# EAGLE board MCPGrundplatte8Eingabe_8Ausgabe (EAGLE 9.6.2)
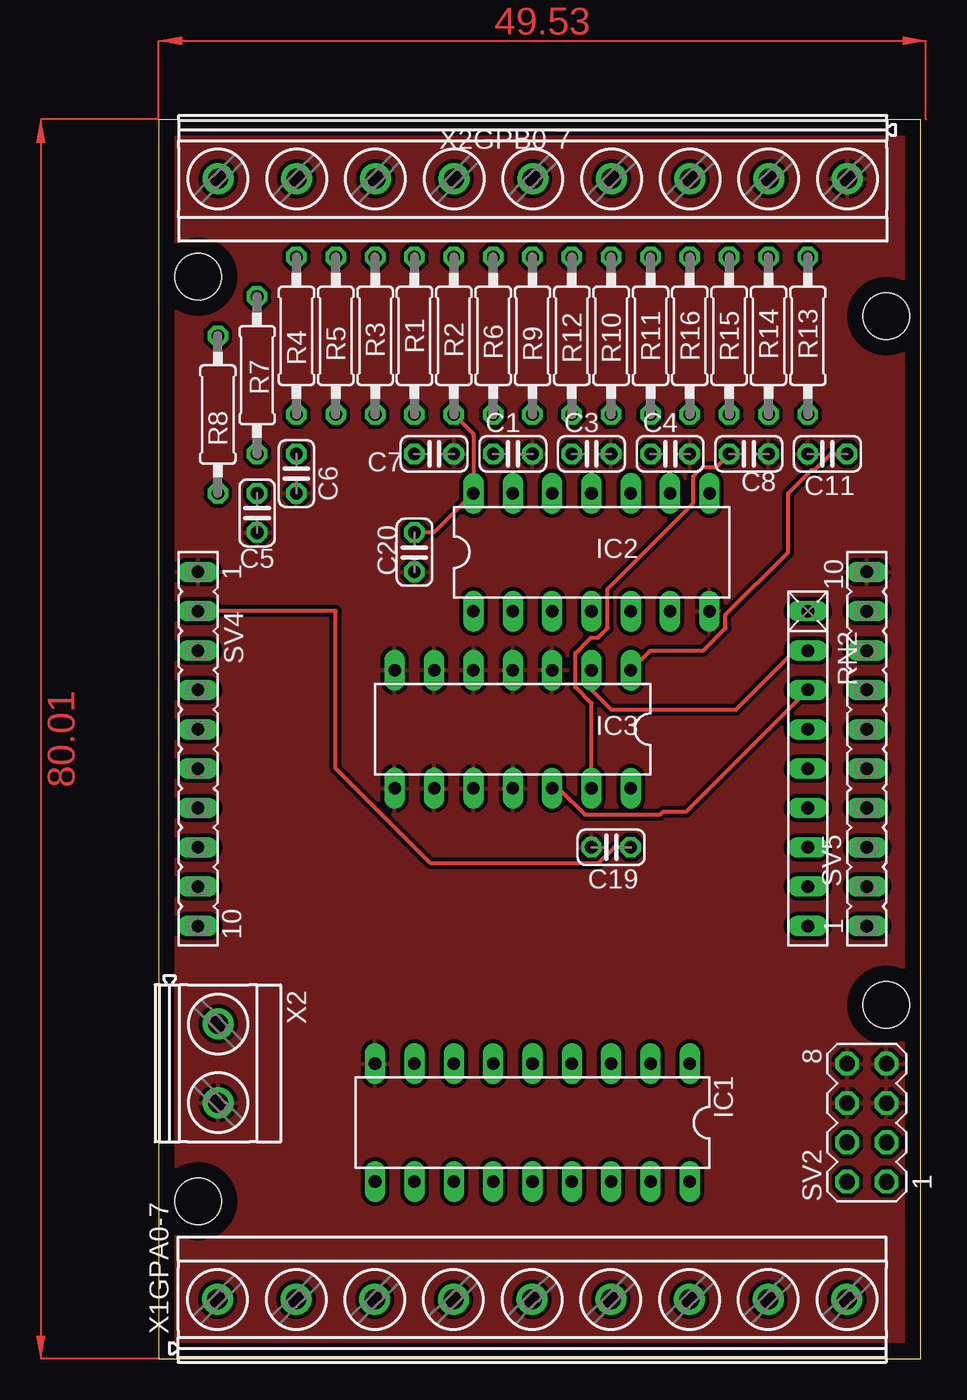
[diagram p0: board, top side]
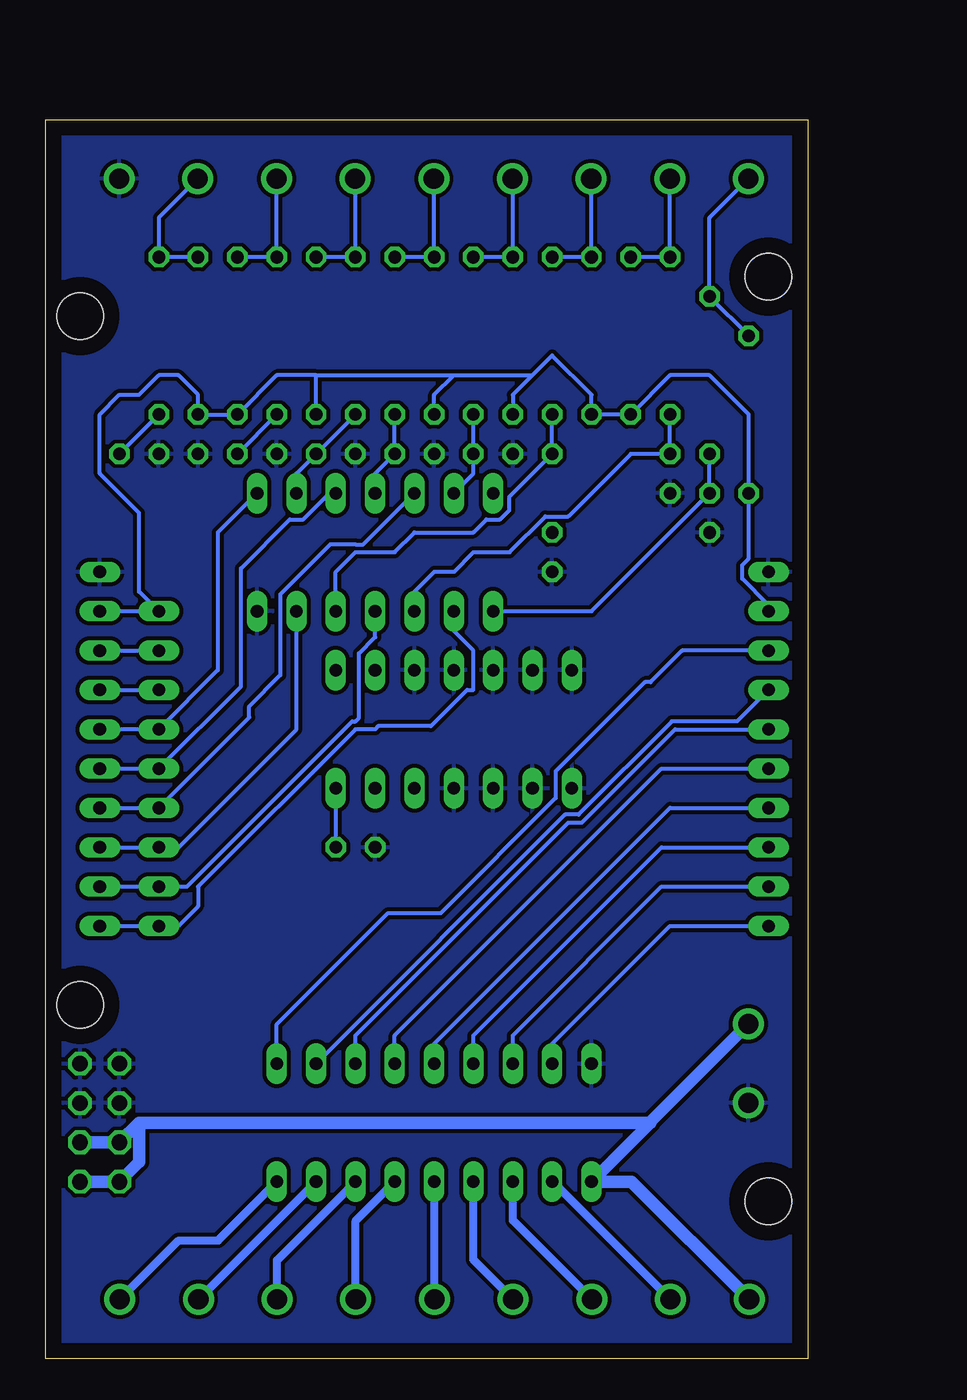
[diagram p1: board, bottom side, seen from below]

Size 49.2 x 80 mm. Coordinates in mm from the lower left corner, seen from the top.
Outline: 0,0 49.2,0 49.2,80 0,80 0,0
Copper layers (1*16): Top 0.035mm / dielectric 1.5mm / Bottom 0.035mm
Design rules "platinenbelichter": minimum track width 10mil, minimum drill 24mil, track to track 10mil, track to pad 10mil, pad to pad 10mil, via to via 10mil, smd to smd 10mil, copper to edge 40mil, drill to drill 8mil, minimum pad ring 10mil, minimum via ring 8mil, stop-mask expansion 10mil, vias tented up to drill 0mil, thermal gap 10mil
Holes 3 mm at 2.54,69.85 46.99,22.86 2.54,10.16 46.99,67.31

## Footprints (pad centres in the part's own frame; a part is rotated, then mirrored left to right if it is on the bottom)
C025-024X044 = drill 0.813 octagon: 1 -1.27,0; 2 1.27,0
DIL18 = drill 0.813 long: 1 -10.16,-3.81; 2 -7.62,-3.81; 3 -5.08,-3.81; 4 -2.54,-3.81; 5 0,-3.81; 6 2.54,-3.81; 7 5.08,-3.81; 8 7.62,-3.81; 9 10.16,-3.81; 10 10.16,3.81; 11 7.62,3.81; 12 5.08,3.81; 13 2.54,3.81; 14 0,3.81; 15 -2.54,3.81; 16 -5.08,3.81; 17 -7.62,3.81; 18 -10.16,3.81
DIL14 = drill 0.813 long: 1 -7.62,-3.81; 2 -5.08,-3.81; 3 -2.54,-3.81; 4 0,-3.81; 5 2.54,-3.81; 6 5.08,-3.81; 7 7.62,-3.81; 8 7.62,3.81; 9 5.08,3.81; 10 2.54,3.81; 11 0,3.81; 12 -2.54,3.81; 13 -5.08,3.81; 14 -7.62,3.81
0207/10 = drill 0.813 octagon: 1 -5.08,0; 2 5.08,0
RN-9 = drill 0.813 long: 1 -10.16,0; 2 -7.62,0; 3 -5.08,0; 4 -2.54,0; 5 0,0; 6 2.54,0; 7 5.08,0; 8 7.62,0; 9 10.16,0
MA04-2 = drill 1.016 octagon: 1 -3.81,-1.27; 2 -3.81,1.27; 3 -1.27,-1.27; 4 -1.27,1.27; 5 1.27,-1.27; 6 1.27,1.27; 7 3.81,-1.27; 8 3.81,1.27
FE10 = drill 0.813 long: 1 -11.43,0; 2 -8.89,0; 3 -6.35,0; 4 -3.81,0; 5 -1.27,0; 6 1.27,0; 7 3.81,0; 8 6.35,0; 9 8.89,0; 10 11.43,0
MKDSN1,5/9-5,08 = drill 1.3 pad 2: 1 -20.341,0.025; 2 -15.261,0.025; 3 -10.181,0.025; 4 -5.101,0.025; 5 -0.021,0.025; 6 5.059,0.025; 7 10.139,0.025; 8 15.219,0.025; 9 20.299,0.025
MKDSN1,5/2-5,08 = drill 1.3 pad 2: 1 -2.561,0.025; 2 2.519,0.025

## Placement (x,y rotation side)
C1  100Nf  [C025-024X044]  22.86,58.42 0 top
C3  100nF  [C025-024X044]  27.94,58.42 0 top
C4  100nF  [C025-024X044]  33.02,58.42 0 top
C5  100nF  [C025-024X044]  6.35,54.61 270 top
C6  100nF  [C025-024X044]  8.89,57.15 270 top
C7  100nF  [C025-024X044]  17.78,58.42 0 top
C8  100nF  [C025-024X044]  38.1,58.42 0 top
C11  100nF  [C025-024X044]  43.18,58.42 180 top
C19  100nF  [C025-024X044]  29.21,33.02 0 top
C20  100nF  [C025-024X044]  16.51,52.07 270 top
IC1  ULN2803  [DIL18]  24.13,15.24 180 top
IC2  74HC14N  [DIL14]  27.94,52.07 0 top
IC3  74HC14N  [DIL14]  22.86,40.64 180 top
R1  10k  [0207/10]  16.51,66.04 270 top
R2  10k  [0207/10]  19.05,66.04 90 top
R3  10k  [0207/10]  13.97,66.04 90 top
R4  10k  [0207/10]  8.89,66.04 270 top
R5  10k  [0207/10]  11.43,66.04 270 top
R6  10k  [0207/10]  21.59,66.04 270 top
R7  10k  [0207/10]  6.35,63.5 270 top
R8  10k  [0207/10]  3.81,60.96 90 top
R9  10k  [0207/10]  24.13,66.04 90 top
R10  10k  [0207/10]  29.21,66.04 270 top
R11  10k  [0207/10]  31.75,66.04 90 top
R12  10k  [0207/10]  26.67,66.04 270 top
R13  10k  [0207/10]  41.91,66.04 270 top
R14  10k  [0207/10]  39.37,66.04 90 top
R15  10k  [0207/10]  36.83,66.04 90 top
R16  10k  [0207/10]  34.29,66.04 270 top
RN2  100K  [RN-9]  41.91,38.1 270 top
SV2  [MA04-2]  45.72,15.24 90 top
SV4  [FE10]  2.54,39.37 270 top
SV5  [FE10]  45.72,39.37 90 top
X1GPA0-7  MKDSN1,5/9-5,08  [MKDSN1,5/9-5,08]  24.13,3.81 0 top
X2  MKDSN1,5/2-5,08  [MKDSN1,5/2-5,08]  3.81,19.05 270 top
X2GPB0-7  MKDSN1,5/9-5,08  [MKDSN1,5/9-5,08]  24.13,76.2 180 top

## Library data of the parts
C1 C3-C8 C11 C19 C20 = rcl; SPICEPREFIX: C
IC1 = uln-udn
IC2 IC3 = 74xx-eu
R1-R16 = rcl; SPICEPREFIX: R
RN2 = resistor-net; OC_FARNELL: unknown; OC_NEWARK: unknown
SV2 = con-lstb; OC_FARNELL: unknown; OC_NEWARK: unknown
SV4 SV5 = con-lsta; OC_FARNELL: unknown; OC_NEWARK: unknown
X1GPA0-7 X2 X2GPB0-7 = con-phoenix-508

## Nets
+12V: IC1.10 SV2.1 SV2.2 SV2.3 SV2.4 X1GPA0-7.1 X2.1
GND: C1.2 C3.2 C4.2 C5.2 C6.2 C7.2 C8.2 C11.2 C19.1 C20.2 IC1.9 IC2.7 IC3.3 IC3.4 IC3.5 IC3.6 IC3.7 IC3.8 IC3.9 IC3.10 IC3.11 SV2.5 SV2.6 SV2.7 SV2.8 SV4.1 SV5.10 X2.2 X2GPB0-7.1
GPA0.: IC1.1 SV4.3
GPA1.: IC1.2 SV4.4
GPA2: IC1.3 SV4.5
GPA3: IC1.4 SV4.6
GPA4: IC1.5 SV4.7
GPA5.: IC1.6 SV4.8
GPA6.: IC1.7 SV4.9
GPA7.: IC1.8 SV4.10
GPB0: R7.1 R8.2 X2GPB0-7.9
GPB0.: IC2.2 RN2.9 SV5.1
GPB1: R4.1 R5.1 X2GPB0-7.8
GPB1.: IC2.4 RN2.8 SV5.2
GPB2: R1.1 R3.2 X2GPB0-7.7
GPB2.: IC2.6 RN2.7 SV5.3
GPB3: R2.2 R6.1 X2GPB0-7.6
GPB3.: IC2.12 RN2.6 SV5.4
GPB4: R9.2 R12.1 X2GPB0-7.5
GPB4.: IC2.10 RN2.5 SV5.5
GPB5: R10.1 R11.2 X2GPB0-7.4
GPB5.: IC2.8 RN2.4 SV5.6
GPB6: R15.2 R16.1 X2GPB0-7.3
GPB6.: IC3.12 RN2.3 SV5.7
GPB7: R13.1 R14.2 X2GPB0-7.2
GPB7.: IC3.2 RN2.2 SV5.8
IC2_OUT1: IC1.18 X1GPA0-7.9
IC2_OUT2: IC1.17 X1GPA0-7.8
IC2_OUT3: IC1.16 X1GPA0-7.7
IC2_OUT4: IC1.15 X1GPA0-7.6
IC2_OUT5: IC1.14 X1GPA0-7.5
IC2_OUT6: IC1.13 X1GPA0-7.4
IC2_OUT7: IC1.12 X1GPA0-7.3
IC2_OUT8: IC1.11 X1GPA0-7.2
N$2: C7.1 IC2.5 R1.2
N$4: C1.1 IC2.13 R6.2
N$5: C6.1 IC2.3 R4.2
N$6: C5.1 IC2.1 R7.2
N$7: C4.1 IC2.9 R10.2
N$8: C3.1 IC2.11 R12.2
N$9: C8.1 IC3.13 R16.2
N$11: C11.1 IC3.1 R13.2
VDD: C19.2 C20.1 IC2.14 IC3.14 R2.1 R3.1 R5.2 R8.1 R9.1 R11.1 R14.1 R15.1 RN2.1 SV4.2 SV5.9

## Tracks (layer width: path | path; a pad name or v marks a point on that pad's centre or on a via)
+12V
  Bottom 0.813: 10.16,15.24 IC1.10 11.38,11.43 X1GPA0-7.1 | X2.1 10.16,15.29 10.16,15.24 | 10.16,15.24 38.1,15.24 43.18,15.24 | 43.18,15.24 SV2.4 SV2.3 | SV2.1 SV2.2 43.18,12.7 43.18,15.24
GND
  pour Bottom: 0,80.01 49.53,80.01 49.53,0 0,0
  pour Top: 0,80.01 49.53,80.01 49.53,0 0,0
GPA0.
  Bottom 0.254: IC1.1 34.29,21.59 27.1,28.78 23.7,28.78 16.28,36.2 16.28,37.92 10.52,43.69 10.16,43.69 8.13,45.72 SV4.3
GPA1.
  Bottom 0.254: IC1.2 15.67,35.13 14.81,35.13 8.79,41.15 4.57,41.15 SV4.4
GPA2
  Bottom 0.254: IC1.3 29.21,20.87 15.46,34.62 14.6,34.62 8.58,40.64 SV4.5
GPA3
  Bottom 0.254: IC1.4 26.67,20.87 9.44,38.1 SV4.6
GPA4
  Bottom 0.254: IC1.5 24.13,20.32 8.89,35.56 SV4.7
GPA5.
  Bottom 0.254: IC1.6 21.59,20.87 9.44,33.02 SV4.8
GPA6.
  Bottom 0.254: IC1.7 19.05,20.87 9.44,30.48 SV4.9
GPA7.
  Bottom 0.254: IC1.8 16.51,20.32 8.89,27.94 SV4.10
GPB0
  Bottom 0.254: X2GPB0-7.9 6.35,73.66 R7.1 R8.2
GPB0.
  Bottom 0.254: SV5.1 RN2.9 40.64,27.94 39.37,29.21 39.37,30.48 29.21,40.64 27.94,40.64 27.74,40.84 24.33,40.84 22,43.18 21.59,43.18 21.59,45.72 22.86,46.99 IC2.2
GPB1
  Bottom 0.254: X2GPB0-7.8 8.89,76.15 R4.1 R5.1
GPB1.
  Bottom 0.254: SV5.2 RN2.8 40.09,30.48 29.42,41.15 29.21,41.15 28.98,41.38 28.98,45.54 27.94,46.58 IC2.4
GPB2
  Bottom 0.254: X2GPB0-7.7 13.97,76.15 R3.2 R1.1
GPB2.
  Bottom 0.254: SV5.3 RN2.7 40.64,33.02 33.02,40.64 IC2.6
GPB3
  Bottom 0.254: X2GPB0-7.6 19.05,76.15 R2.2 R6.1
GPB3.
  Bottom 0.254: SV5.4 RN2.6 36.07,41.4 36.07,42.12 34.06,44.13 34.06,49.35 30.84,52.58 29.21,52.58 28.7,52.58 IC2.12
GPB4
  Bottom 0.254: X2GPB0-7.5 24.13,76.15 R9.2 R12.1
GPB4.
  Bottom 0.254: SV5.5 RN2.5 36.6,43.41 36.6,51.03 33.45,54.18 32.59,54.18 30.89,55.88 IC2.10
GPB5
  Bottom 0.254: R11.2 R10.1 29.21,76.15 X2GPB0-7.4
GPB5.
  Bottom 0.254: IC2.8 38.1,53.34 38.1,44.45 RN2.4 SV5.6
GPB6
  Bottom 0.254: R15.2 R16.1 34.29,76.15 X2GPB0-7.3
GPB6.
  Top 0.254: IC3.12 25.81,36.83 27.51,35.13 32.38,35.13 32.59,35.33 34.06,35.33 RN2.3
  Bottom 0.254: SV5.7 RN2.3
GPB7
  Bottom 0.254: R14.2 R13.1 41.91,73.66 X2GPB0-7.2
GPB7.
  Top 0.254: RN2.2 41.07,45.72 37.26,41.91 29.21,41.91 27.94,43.18 IC3.2
  Bottom 0.254: SV5.8 RN2.2
IC2_OUT1
  Bottom 0.508: X1GPA0-7.9 40.62,7.64 38.08,7.64 IC1.18
IC2_OUT2
  Bottom 0.508: X1GPA0-7.8 IC1.17
IC2_OUT3
  Bottom 0.508: X1GPA0-7.7 34.27,6.37 IC1.16
IC2_OUT4
  Bottom 0.508: X1GPA0-7.6 29.19,8.91 IC1.15
IC2_OUT5
  Bottom 0.508: X1GPA0-7.5 24.11,11.41 IC1.14
IC2_OUT6
  Bottom 0.508: X1GPA0-7.4 21.59,6.4 IC1.13
IC2_OUT7
  Bottom 0.508: X1GPA0-7.3 19.05,8.94 IC1.12
IC2_OUT8
  Bottom 0.508: X1GPA0-7.2 16.46,11.43 IC1.11
N$2
  Bottom 0.254: IC2.5 30.48,50.8 29.21,52.07 26.67,52.07 25.4,53.34 21.59,53.34 20.75,54.18 19.89,54.18 19.28,54.79 19.28,55.65 C7.1 R1.2
N$4
  Bottom 0.254: IC2.13 21.59,57.15 C1.1 R6.2
N$5
  Bottom 0.254: IC2.3 25.4,49.53 24.13,50.8 22.86,50.8 21.59,52.07 19.25,52.07 16.94,54.38 15.47,54.38 11.43,58.42 C6.1 R4.2
N$6
  Bottom 0.254: IC2.1 15.24,48.26 15.04,48.26 13.97,48.26 C5.1 R7.2
N$7
  Bottom 0.254: R10.2 C4.1 33.02,57.15 IC2.9
N$8
  Bottom 0.254: R12.2 C3.1 27.94,57.15 IC2.11
N$9
  Top 0.254: C8.1 35.99,57.58 35.13,57.58 34.52,56.97 34.52,55.24 28.98,49.71 28.98,47.17 28.37,46.56 27.91,46.56 26.9,45.54 26.9,43.36 27.94,42.32 IC3.13
  Bottom 0.254: C8.1 R16.2
N$11
  Top 0.254: IC3.1 31.75,45.72 35.15,45.72 36.6,47.17 36.6,48.03 40.64,52.07 40.64,55.88 42.14,57.38 42.34,57.38 43.38,58.42 C11.1
  Bottom 0.254: C11.1 R13.2
VDD
  Top 0.254: R2.1 20.32,59.69 IC2.14 17.78,53.34 C20.1 | C19.2 29.41,33.02 28.37,31.98 17.55,31.98 11.43,38.1 11.43,48.26 SV4.2
  Bottom 0.254: SV5.9 RN2.1 43.18,49.53 43.18,54.61 45.72,57.15 45.72,60.96 44.45,62.23 43.18,62.23 41.91,63.5 40.64,63.5 39.37,62.23 R14.1 R15.1 34.29,63.5 31.75,63.5 | 17.78,63.5 16.51,64.77 13.97,62.23 R3.1 R5.2 8.89,63.5 6.35,63.5 3.81,60.96 R8.1 3.81,51.66 4.24,51.23 4.24,50.8 4.24,50.37 2.54,48.67 SV4.2 | 17.78,63.5 19.05,62.23 R2.1 | R9.1 24.13,62.23 22.86,63.5 | 22.86,63.5 17.78,63.5 | R11.1 31.75,63.5 | 31.75,63.5 22.86,63.5 | IC3.14 C19.2
(copper drawn outside any net)
  shapes: Top area x2

## Text on the board
tDocu: SX2MCP23017 / INPUT / Version V5